# Altium PCB imx477.PcbDoc
Units mm, origin at the board's own origin, x right, y up, seen from the top; angles counter-clockwise.
Board outline 27 x 27 mm, 4 copper layers (Top Layer, Layer 1, Layer 2, Bottom Layer), stack 0.746 mm thick; 65 components, 34 nets, 347 pads, 310 vias.
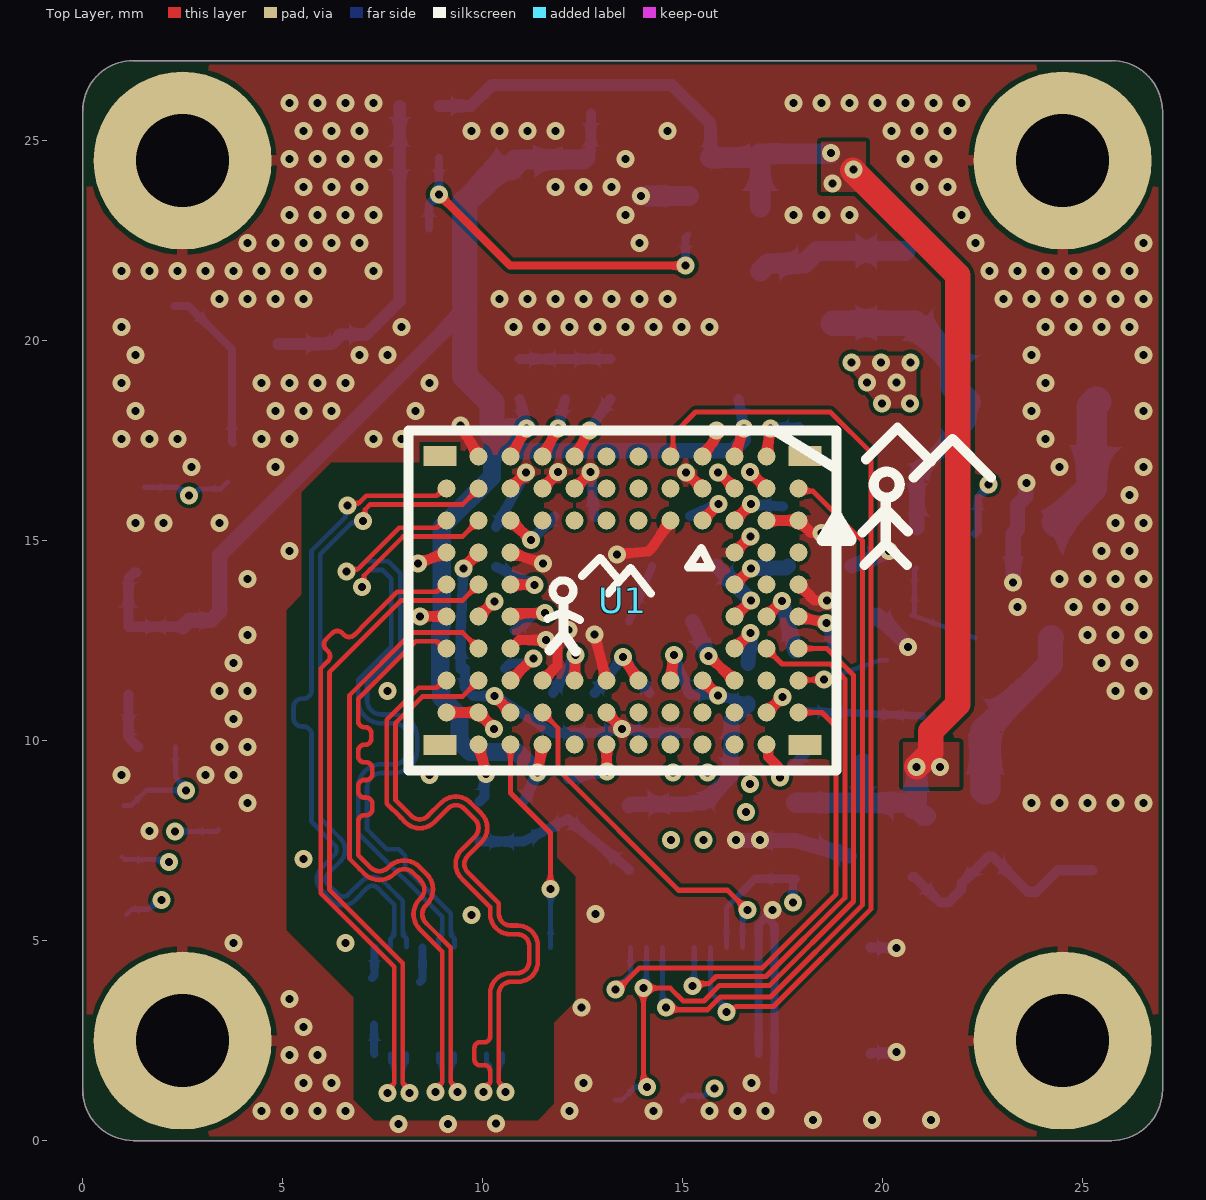
[diagram p0: Top Layer view]
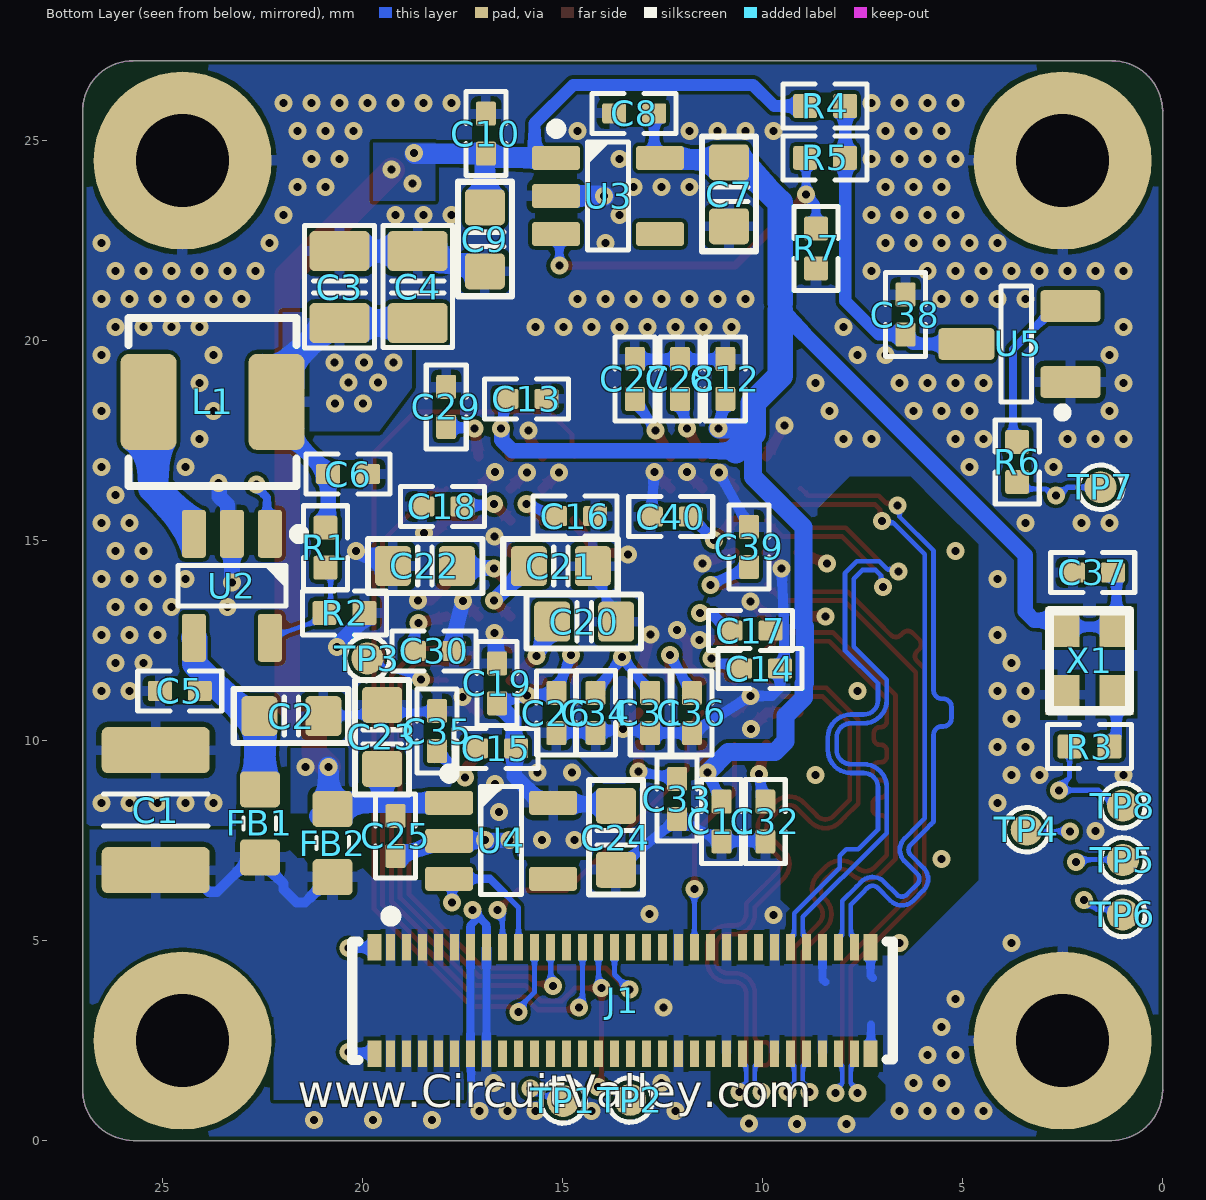
[diagram p1: Bottom Layer view, seen from below]
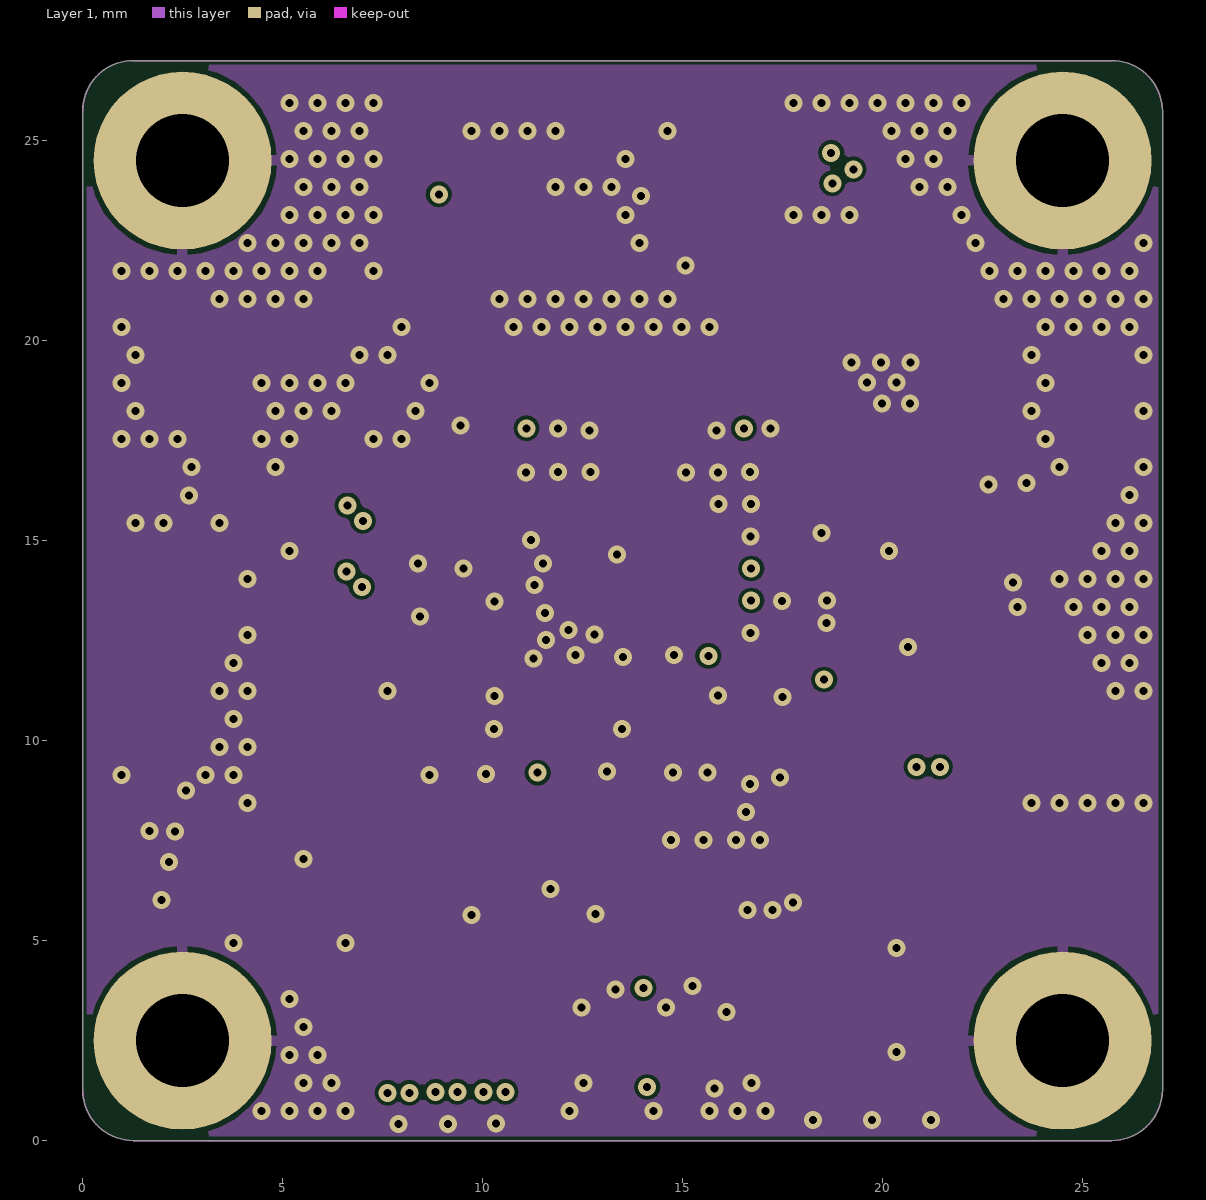
[diagram p2: Layer 1]
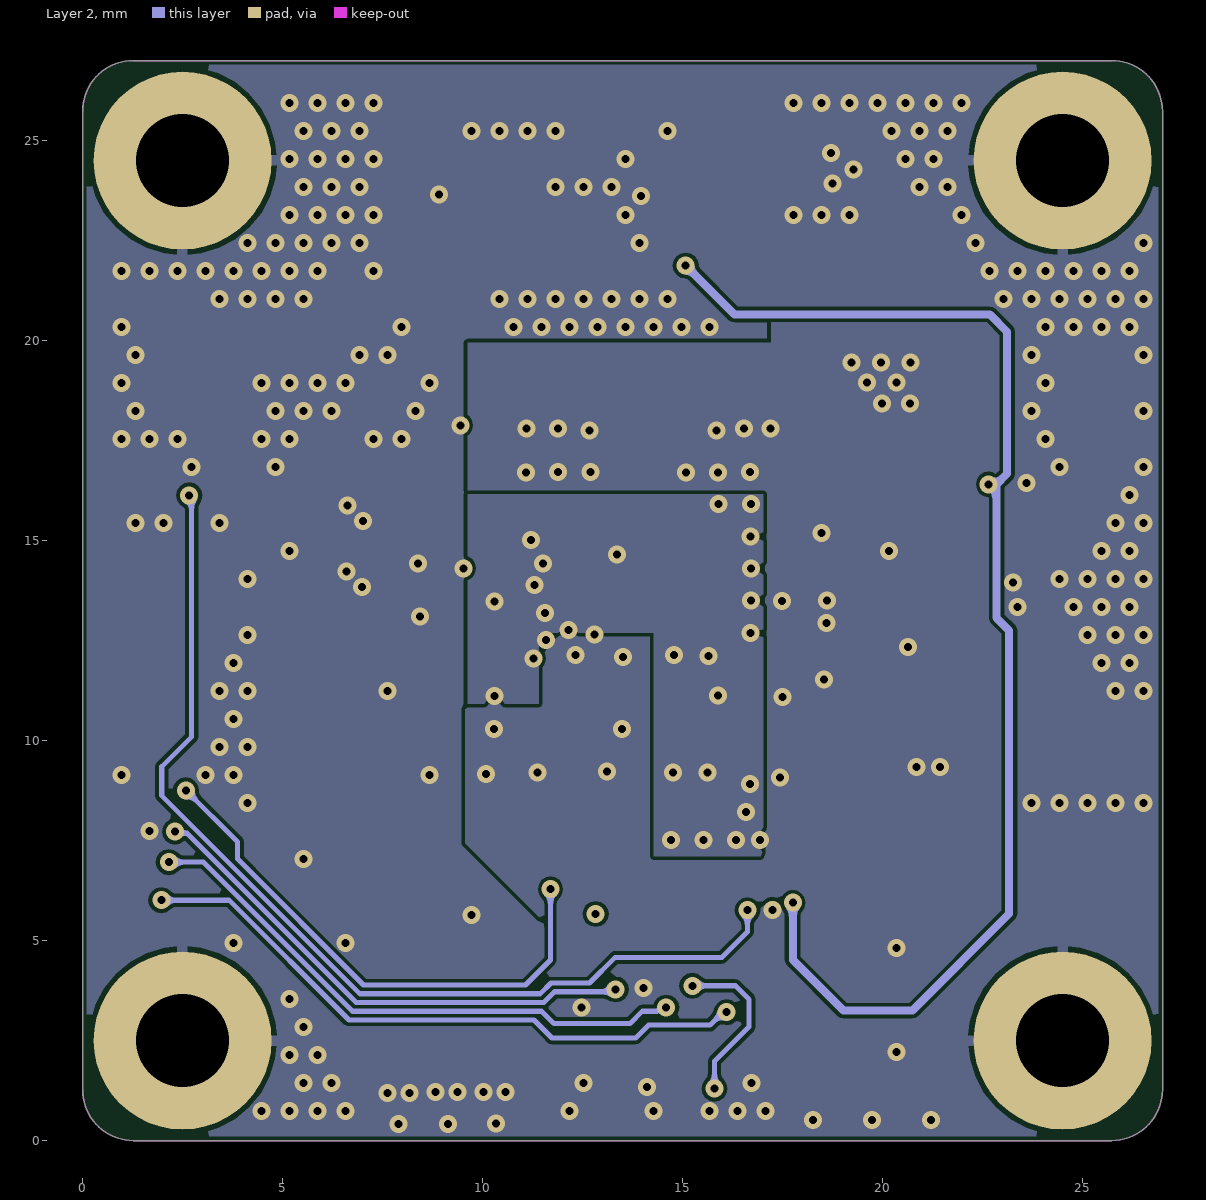
[diagram p3: Layer 2]
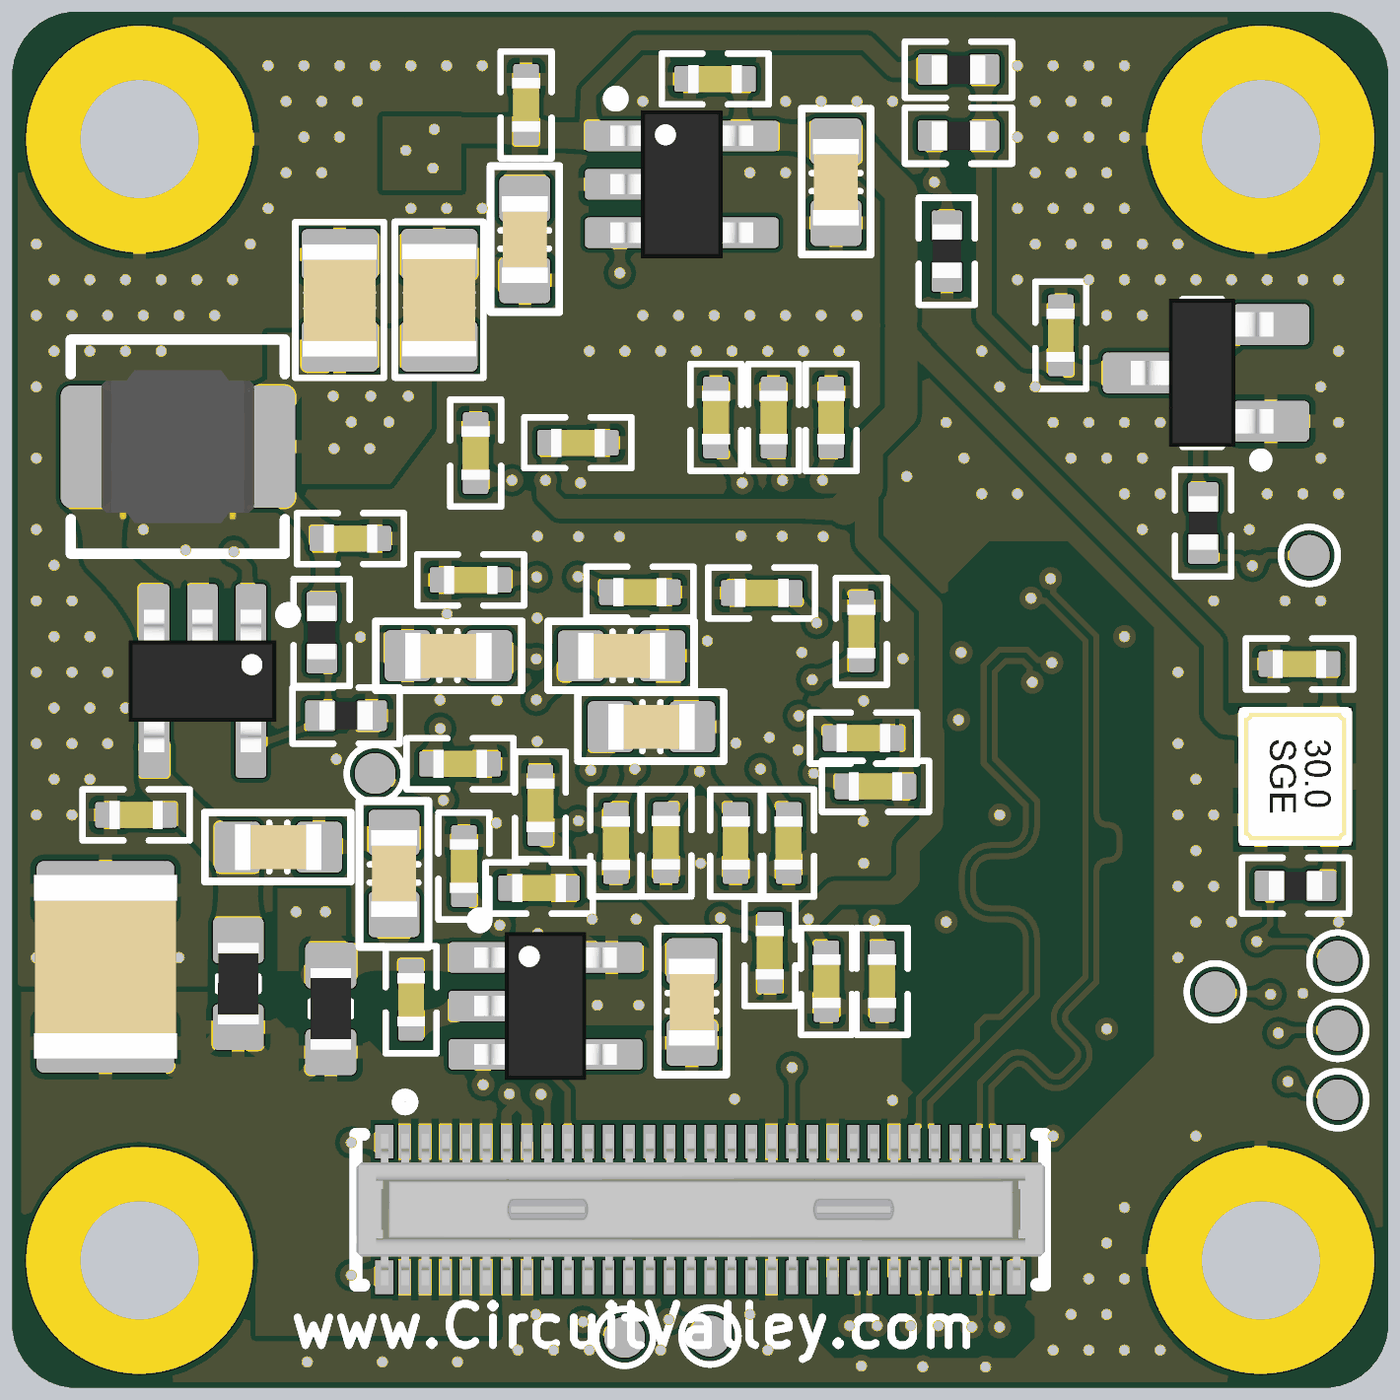
[diagram p4: 3D render of the assembled board from below, using the file's embedded part models]

## Layer stack, top to bottom
Top Solder: solder mask 0.01, Solder Resist, Dk 3.5
Top Layer: signal copper 0.036
Dielectric 2: prepreg 0.071, PP-006, Dk 4.1
Layer 1: signal copper 0.035
Dielectric 4: prepreg 0.071, PP-006, Dk 4.1
Dielectric 1: dielectric 0.32, FR-4, Dk 4.8
Dielectric 5: prepreg 0.071, PP-006, Dk 4.1
Layer 2: signal copper 0.035
Dielectric 3: prepreg 0.071, PP-006, Dk 4.1
Bottom Layer: signal copper 0.036
Bottom Solder: solder mask 0.01, Solder Resist, Dk 3.5

## Board outline
0,1.27 0,25.73 cw(c1.27,25.73) 1.27,27 25.73,27 cw(c25.73,25.73) 27,25.73 27,1.27 cw(c25.73,1.27) 25.73,0 1.27,0 cw(c1.27,1.27)

## Design rules (kind name [scope] priority, off if disabled: settings)
Clearance Clearance_GNDT [OnLayer('GND_T')] p1: gap=0.127 ignorepadtopadclearanceinfootprint=FALSE
Clearance Clearance_INT [OnLayer('Signal_INT')] p2: gap=0.127 ignorepadtopadclearanceinfootprint=FALSE
Clearance [All] p3: gap=0.092 ignorepadtopadclearanceinfootprint=FALSE
Clearance Clearance_PWR [OnLayer('PWR')] p4: gap=0.127 ignorepadtopadclearanceinfootprint=FALSE
Clearance Clearance_GNDB [OnLayer('GND_B')] p5: gap=0.127 ignorepadtopadclearanceinfootprint=FALSE
ComponentClearance [All] p1: gap=0.254 collisioncheckmode=3 verticalgap=0 showdistances=FALSE
DiffPairsRouting [All] p1: maxlimit=0.102 minlimit=0.102 mostfreqgap=0.102 toplayer_minwidth=0.117 toplayer_maxwidth=0.254 toplayer_prefwidth=0.117 midlayer1_minwidth=0.117 midlayer1_maxwidth=0.254 midlayer1_prefwidth=0.117 midlayer4_minwidth=0.117 midlayer4_maxwidth=0.254 midlayer4_prefwidth=0.117 bottomlayer_minwidth=0.117 bottomlayer_maxwidth=0.254 bottomlayer_prefwidth=0.117 maxuncoupledlength=12.7
HoleSize [All] p1: absolutevalues=TRUE maxlimit=5 minlimit=0.025 maxpercent=80.000 minpercent=20.000
MatchedLengths Matched_MIPI_GRP [InNetClass('MIPI')] p1: tolerance=0.127 checknetsindiffpair=FALSE checkdiffpairvsdiffpair=TRUE checkxsignals=TRUE checkothers=TRUE
MatchedLengths Matched_MIPI [InNetClass('MIPI')] p2: tolerance=0.127 checknetsindiffpair=TRUE checkdiffpairvsdiffpair=FALSE checkxsignals=FALSE checkothers=FALSE
MatchedLengths Matched_GPIF_GRP [InNetClass('GPIF')] p3: tolerance=1.27 checknetsindiffpair=FALSE checkdiffpairvsdiffpair=TRUE checkxsignals=TRUE checkothers=TRUE
MatchedLengths Matched_USB3FX_GRP [InNetClass('USB3FX')] p4: tolerance=0.127 checknetsindiffpair=FALSE checkdiffpairvsdiffpair=TRUE checkxsignals=TRUE checkothers=TRUE
MatchedLengths Match_USB3FX [InNetClass('USB3FX')] p5: tolerance=0.102 checknetsindiffpair=TRUE checkdiffpairvsdiffpair=FALSE checkxsignals=FALSE checkothers=FALSE
MatchedLengths Matched_USB3_GRP [InNetClass('USB3')] p6: tolerance=0.254 checknetsindiffpair=FALSE checkdiffpairvsdiffpair=TRUE checkxsignals=TRUE checkothers=TRUE
MatchedLengths Matched_USB2 [InNetClass('USB2')] p7: tolerance=1.016 checknetsindiffpair=TRUE checkdiffpairvsdiffpair=FALSE checkxsignals=FALSE checkothers=FALSE
MatchedLengths Matched_USB3 [InNetClass('USB3')] p8: tolerance=0.102 checknetsindiffpair=TRUE checkdiffpairvsdiffpair=FALSE checkxsignals=FALSE checkothers=FALSE
MinimumSolderMaskSliver [All] p1: minsoldermaskwidth=0.001
PlaneClearance [All] p1: clearance=0.152
PlaneConnect PlaneConnect_1 [All] p1: pad.planeconnectstyle=Relief pad.reliefexpansion=0.508 pad.reliefentries=4 pad.reliefconductorwidth=0.254 pad.reliefairgap=0.127 via.planeconnectstyle=Direct via.reliefexpansion=0.508 via.reliefentries=4 via.reliefconductorwidth=0.254 via.reliefairgap=0.254
PolygonConnect [All] p1: thpad.connectstyle=Relief thpad.reliefconductorwidth=0.254 thpad.reliefentries=4 thpad.polygonreliefangle="90 Angle" thpad.airgapwidth=0.127 smdpad.connectstyle=Relief smdpad.reliefconductorwidth=0.254 smdpad.reliefentries=4 smdpad.polygonreliefangle="90 Angle" smdpad.airgapwidth=0.127 via.connectstyle=Direct via.reliefconductorwidth=0.254 via.reliefentries=4 via.polygonreliefangle="90 Angle" via.airgapwidth=0.254
RoutingVias [All] p1: holewidth=0.2 width=0.45 viastyle="Through Hole" minholewidth=0.2 minwidth=0.45 maxholewidth=6.3 maxwidth=7
SilkToSilkClearance [All] p1: silktosilkclearance=0
SilkToSolderMaskClearance [IsPad] p1: minsilkscreentomaskgap=0 clearancetoexposedcopper=TRUE
SolderMaskExpansion [All] p1: expansion=0.025 istentingtop=FALSE
Width [All] p1: maxlimit=1.27 minlimit=0.09 preferedwidth=0.127 midlayer1_minwidth=0.127 midlayer4_minwidth=0.127 minimp=50.000000 maximp=50.000000 favimp=50.000000
22 further rules are at their usual default settings.

## Classes and differential pairs
net class MIPI: CAM_CLK_N CAM_CLK_P CAM_D1_N CAM_D1_P CAM_D2_N CAM_D2_P CAM_D3_N CAM_D3_P CAM_D4_N CAM_D4_P
differential pair CAM_D4: +CAM_D4_P -CAM_D4_N
differential pair CAM_D3: +CAM_D3_P -CAM_D3_N
differential pair CAM_D2: +CAM_D2_P -CAM_D2_N
differential pair CAM_D1: +CAM_D1_P -CAM_D1_N
differential pair CAM_CLK: +CAM_CLK_P -CAM_CLK_N

## Components (designator, comment, footprint, x,y, rotation, side; value= is the part's Value field where it differs from the comment)
C1 "10µ" CAPC3225N 25.17,8.259 r90 bottom
C2 "approved sub OK" CAPC1608N 21.779,10.609 r180 bottom value=10u
C3 "10uF" CAPC2012N 20.574,21.336 r90 bottom
C4 "10uF" CAPC2012N 18.621,21.34 r90 bottom
C5 "100n" CAPC1005N 24.568,11.24 r180 bottom
C6 "100n" CAPC1005N 20.363,16.662 r0 bottom
C7 "approved sub OK" CAPC1608N 10.836,23.655 r270 bottom value=10u
C8 "100n" CAPC1005N 13.208,25.679 r180 bottom
C9 "approved sub OK" CAPC1608N 16.942,22.53 r270 bottom value=10u
C10 "100n" CAPC1005N 16.916,25.171 r270 bottom
C11 "100n" CAPC1005N 11.024,7.976 r90 bottom
C12 "100n" CAPC1005N 10.932,19.039 r270 bottom
C13 "100n" CAPC1005N 15.9,18.542 r0 bottom
C14 "100n" CAPC1005N 10.062,11.8 r0 bottom
C15 "100n" CAPC1005N 16.662,9.804 r180 bottom
C16 "100n" CAPC1005N 14.683,15.61 r0 bottom
C17 "100n" CAPC1005N 10.297,12.748 r0 bottom
C18 "100n" CAPC1005N 18.004,15.851 r180 bottom
C19 "100n" CAPC1005N 16.637,11.43 r270 bottom
C20 "approved sub OK" CAPC1608N 14.457,12.971 r180 bottom value=1u
C21 "approved sub OK" CAPC1608N 15.042,14.36 r180 bottom value=2u2
C22 "approved sub OK" CAPC1608N 18.442,14.365 r0 bottom value=2u2
C23 "approved sub OK" CAPC1608N 19.509,10.092 r90 bottom value=10u
C24 "approved sub OK" CAPC1608N 13.665,7.569 r270 bottom value=10u
C25 "100n" CAPC1005N 19.173,7.613 r90 bottom
C26 "100n" CAPC1005N 15.154,10.688 r90 bottom
C27 "100n" CAPC1005N 13.192,19.039 r270 bottom
C28 "100n" CAPC1005N 12.062,19.039 r270 bottom
C29 "100n" CAPC1005N 17.907,18.339 r270 bottom
C30 "100n" CAPC1005N 18.212,12.243 r0 bottom
C31 "100n" CAPC1005N 12.807,10.688 r90 bottom
C32 "100n" CAPC1005N 9.931,7.976 r90 bottom
C33 "100n" CAPC1005N 12.133,8.54 r90 bottom
C34 "100n" CAPC1005N 14.173,10.693 r90 bottom
C35 "100n" CAPC1005N 18.136,10.236 r270 bottom
C36 "100n" CAPC1005N 11.766,10.688 r90 bottom
C37 "100n" CAPC1005N 1.743,14.201 r180 bottom
C38 "100n" CAPC1005N 6.426,20.65 r270 bottom
C39 "100n" CAPC1005N 10.338,14.842 r270 bottom
C40 "100n" CAPC1005N 12.294,15.596 r180 bottom
FB1 "Ferrite" INDC1608N 22.565,7.928 r90 bottom
FB2 "Ferrite" INDC1608N 20.749,7.437 r90 bottom
J1 "DF40C-60DP-0.4V(51)" DF40C-60DP-0.4V 13.5,3.5 r180 bottom locked
L1 "2u2" FDSD0420-H-2R2M 23.749,18.466 r180 bottom
R1 "Thick Film" RESC1005N 20.927,14.82 r90 bottom value=30K
R2 "Thick Film" RESC1005N 20.449,13.188 r0 bottom value=27K
R3 "Thick Film" RESC1005N 1.822,9.85 r0 bottom value=0R
R4 "Thick Film" RESC1005N 8.433,25.863 r0 bottom value="2.2K NC"
R5 "Thick Film" RESC1005N 8.433,24.567 r180 bottom value=22R
R6 "Thick Film" RESC1005N 3.632,16.967 r270 bottom value=0R
R7 "Thick Film" RESC1005N 8.661,22.301 r90 bottom value=10K
TP1 "TestPoint" SMD_test_point 14.986,0.991 r0 bottom
TP2 "TestPoint" SMD_test_point 13.31,1.016 r0 bottom
TP3 "TestPoint" SMD_test_point 19.877,12.053 r0 bottom
TP4 "TestPoint" SMD_test_point 3.396,7.77 r0 bottom
TP5 "TestPoint" SMD_test_point 0.991,7.013 r0 bottom
TP6 "TestPoint" SMD_test_point 0.991,5.652 r180 bottom
TP7 "TestPoint" SMD_test_point 1.549,16.332 r180 bottom
TP8 "TestPoint" SMD_test_point 0.991,8.373 r0 bottom
U1 "IMX477AACK-C" IMX477 13.5,13.5 r180 top locked
U2 "AP3417C" SOT23-5 23.266,13.868 r270 bottom
U3 "MIC550x" SOT23-5 13.863,23.614 r180 bottom
U4 "MIC550x" SOT23-5 16.535,7.493 r180 bottom
U5 "APX803" SOT23-3 3.652,19.914 r0 bottom
X1 "DSO221SR" "Active Oscillator 2520" 1.825,11.993 r270 bottom

## Footprints (in the part's own frame and the unit in brackets; to place one, negate y for a bottom-side part, rotate by r counter-clockwise, add the part's x,y. Pads: shape width x height; smd on the part's side, far side on the other; paste and mask are expansions set on the pad)
"Active Oscillator 2520" [mm]
  rect 1x0.85 smd: 1(-0.85,-0.675) 2(0.85,-0.675) 3(0.85,0.675) 4(-0.85,0.675)
  silkscreen extent -1.25,-1 1.25,1, body extent -1.25,-1 1.25,1, height 0.56
CAPC1005N [mm] "Chip Capacitor, Body 1.0x0.5mm, 0402, IPC Medium Density"
  round 0.2 on Mech14: 0(0,0)
  rrect20% 0.6x0.5 smd: 1(-0.5,0) 2(0.5,0)
  Top Layer pour cut-out: -0.2,0.35 0.2,0.35 0.2,-0.35 -0.2,-0.35
  silkscreen extent -1.05,-0.5 1.05,0.5, body extent -0.52,-0.27 0.53,0.28, height 0.55
CAPC1608N [mm] "Chip Capacitor, Body 1.6x0.8mm, 0603, IPC Medium Density"
  round 0.254 on Mech14: 0(0,0)
  rrect25% 0.9x1 smd: 1(-0.8,0) 2(0.8,0)
  silkscreen extent -1.44,-0.67 1.42,0.68, body extent -0.85,-0.45 0.85,0.45, height 0.89
CAPC2012N [mm] "Chip Capacitor, Body 2.0x1.2mm, 0805, IPC Medium Density"
  round 0.254 on Mech14: 0(0,0)
  rrect25% 1x1.5 smd: 1(-0.9,0) 2(0.9,0)
  silkscreen extent -1.52,-0.87 1.54,0.87, body extent -1.1,-0.72 1.1,0.73, height 1.34
CAPC3225N [mm] "Chip Capacitor, Body 3.2x2.5mm, 1210, IPC Medium Density"
  round 0.508 on Mech14: 0(0,0)
  rrect25% 1.15x2.7 smd: 1(-1.5,0) 2(1.5,0)
  silkscreen extent -0.4,-1.3 0.4,1.3, body extent -1.8,-1.4 1.8,1.4, height 2.19
DF40C-60DP-0.4V [mm] "Hiros 60Pin 0.4mm Connector Used with Camera Sensors"
  rect 0.23x0.66 smd: 1(-5.8,1.33) 2(-5.8,-1.33) 3(-5.4,1.33) 4(-5.4,-1.33) 5(-5,1.33) 6(-5,-1.33) 7(-4.6,1.33) 8(-4.6,-1.33) 9(-4.2,1.33) 10(-4.2,-1.33) 11(-3.8,1.33) 12(-3.8,-1.33) 13(-3.4,1.33) 14(-3.4,-1.33) 15(-3,1.33) 16(-3,-1.33) 17(-2.6,1.33) 18(-2.6,-1.33) 19(-2.2,1.33) 20(-2.2,-1.33) 21(-1.8,1.33) 22(-1.8,-1.33) 23(-1.4,1.33) 24(-1.4,-1.33) 25(-1,1.33) 26(-1,-1.33) 27(-0.6,1.33) 28(-0.6,-1.33) 29(-0.2,1.33) 30(-0.2,-1.33) 31(0.2,1.33) 32(0.2,-1.33) 33(0.6,1.33) 34(0.6,-1.33) 35(1,1.33) 36(1,-1.33) 37(1.4,1.33) 38(1.4,-1.33) 39(1.8,1.33) 40(1.8,-1.33) 41(2.2,1.33) 42(2.2,-1.33) 43(2.6,1.33) 44(2.6,-1.33) 45(3,1.33) 46(3,-1.33) 47(3.4,1.33) 48(3.4,-1.33) 49(3.8,1.33) 50(3.8,-1.33) 51(4.2,1.33) 52(4.2,-1.33) 53(4.6,1.33) 54(4.6,-1.33) 55(5,1.33) 56(5,-1.33) 57(5.4,1.33) 58(5.4,-1.33) 59(5.8,1.33) 60(5.8,-1.33)
  rect 0.35x0.66 smd: S1(-6.2,-1.33) S1(-6.2,1.33) S1(6.2,-1.33) S1(6.2,1.33)
  silkscreen extent -6.76,-1.48 6.76,2.24, body extent -6.75,-1.49 6.77,1.48, height 1.1
FDSD0420-H-2R2M [mm] "Murata"
  rrect30% 1.4x2.4 smd: 1(-1.6,0) 2(1.6,0)
  silkscreen extent -2.1,-2.1 2.1,2.1, body extent -1.5,-1.5 1.5,1.5, height 1.35
IMX477 [mm]
  round 0.45 smd: A2(-4.4,-2.8) A3(-4.4,-2) A4(-4.4,-1.2) A5(-4.4,-0.4) A6(-4.4,0.4) A7(-4.4,1.2) A8(-4.4,2) A9(-4.4,2.8) B1(-3.6,-3.6) B2(-3.6,-2.8) B3(-3.6,-2) B4(-3.6,-1.2) B5(-3.6,-0.4) B6(-3.6,0.4) B7(-3.6,1.2) B8(-3.6,2) B9(-3.6,2.8) B10(-3.6,3.6) C1(-2.8,-3.6) C2(-2.8,-2.8) C3(-2.8,-2) C4(-2.8,-1.2) C5(-2.8,-0.4) C6(-2.8,0.4) C7(-2.8,1.2) C8(-2.8,2) C9(-2.8,2.8) C10(-2.8,3.6) D1(-2,-3.6) D2(-2,-2.8) D3(-2,-2) D8(-2,2) D9(-2,2.8) D10(-2,3.6) E1(-1.2,-3.6) E2(-1.2,-2.8) E3(-1.2,-2) E8(-1.2,2) E9(-1.2,2.8) E10(-1.2,3.6) F1(-0.4,-3.6) F2(-0.4,-2.8) F3(-0.4,-2) F8(-0.4,2) F9(-0.4,2.8) F10(-0.4,3.6) G1(0.4,-3.6) G2(0.4,-2.8) G3(0.4,-2) G8(0.4,2) G9(0.4,2.8) G10(0.4,3.6) H1(1.2,-3.6) H2(1.2,-2.8) H3(1.2,-2) H8(1.2,2) H9(1.2,2.8) H10(1.2,3.6) J1(2,-3.6) J2(2,-2.8) J3(2,-2) J8(2,2) J9(2,2.8) J10(2,3.6) K1(2.8,-3.6) K2(2.8,-2.8) K3(2.8,-2) K4(2.8,-1.2) K5(2.8,-0.4) K6(2.8,0.4) K7(2.8,1.2) K8(2.8,2) K9(2.8,2.8) K10(2.8,3.6) L1(3.6,-3.6) L2(3.6,-2.8) L3(3.6,-2) L4(3.6,-1.2) L5(3.6,-0.4) L6(3.6,0.4) L7(3.6,1.2) L8(3.6,2) L9(3.6,2.8) L10(3.6,3.6) M2(4.4,-2.8) M3(4.4,-2) M4(4.4,-1.2) M5(4.4,-0.4) M6(4.4,0.4) M7(4.4,1.2) M8(4.4,2) M9(4.4,2.8)
  rect 0.83x0.5 smd: Q1(-4.565,-3.615) Q2(4.565,-3.615) Q3(4.565,3.615) Q4(-4.565,3.615)
  silkscreen extent -9.21,-4.32 5.35,4.25, body extent -5.36,-4.24 5.34,4.24, height 1.62
INDC1608N [mm] "Chip bead, Body 1.6x0.8mm, 0603, IPC Medium Density"
  round 0.254 on Mech14: 0(0,0)
  rrect25% 0.9x1 smd: 1(-0.85,0) 2(0.85,0)
  Top Layer pour cut-out: -0.4,0.6 0.4,0.6 0.4,-0.6 -0.4,-0.6
  silkscreen extent -0.15,-0.41 0.15,0.41, body extent -0.8,-0.4 0.8,0.4, height 0.79
RESC1005N [mm] "Chip Resistor, Body 1.0x0.5mm, EIA 0402, IPC Medium Density"
  round 0.2 on Mech14: 0(0,0)
  rrect20% 0.6x0.6 smd: 1(-0.5,0) 2(0.5,0)
  Top Layer pour cut-out: -0.2,0.35 0.2,0.35 0.2,-0.35 -0.2,-0.35
  silkscreen extent -1.05,-0.55 1.05,0.55, body extent -0.52,-0.27 0.53,0.28, height 0.4
SMD_test_point [mm]
  round 0.8 smd: 1(0,0)
  silkscreen extent -0.56,-0.56 0.56,0.56, body extent -0.56,-0.3 0.3,0.3, height 1.52
SOT23-3 [mm]
  round 0.5 on Mech14: 0(0,0)
  rrect25% 1.5x0.8 smd: 1(-1.35,0.95) 2(-1.35,-0.95)
  rrect25% 1.4x0.8 smd: 3(1.25,0)
  silkscreen extent -1.25,-1.45 0.38,1.81, body extent -1.4,-1.45 1.4,1.45, height 1.29
SOT23-5 [mm]
  round 0.5 on Mech14: 0(0,0)
  rrect25% 1.2x0.6 smd: 1(-1.3,0.95) 2(-1.3,0) 3(-1.3,-0.95) 4(1.3,-0.95) 5(1.3,0.95)
  silkscreen extent -1.42,-1.35 0.51,1.81, body extent -1.4,-1.45 1.4,1.45, height 1.44

## Part data
C1: library part CAPC_10u_1210_50V, "Capacitor SMD Cer 10uF 20% 16V X5R 1210", Manufacturer 1="Taiyo Yuden", Manufacturer Part Number 1=UMK325BJ106MM-T, Package / Case="1210 (3225 Metric)", Ratings="50V; X5R", Supplier Part Number 1=587-2225-1-ND, Tolerance=±20%, Material=ceramic, Size / Dimension="0.126\" L x 0.098\" W (3.20mm x 2.50mm)", Supplier 1=Digi-Key
C2 C7 C9 C20 C21 C22 C23 C24: library part CAPC_560p_0603_5%, "Capacitor SMD Cer 560pF 5% 50V NP0 0603", Capacitance=470pF, Manufacturer 1="AVX Corporation", Manufacturer Part Number 1=06035A561JAT2A, Operating Temperature="-55°C ~ 125°C", Package / Case="0603 (1608 metric)", Ratings="50V; NP0", Supplier Part Number 1=478-1184-1-ND, Voltage - Rated=50V, Applications="General Purpose", ComponentLink1Description=http://www.avx.com/docs/Catalogs/ccog.pdf, ComponentLink1URL=http://www.avx.com/docs/Catalogs/ccog.pdf, Height - Seated (Max)=-, Lead Spacing=-, Lead Style=-, Material=ceramic, Mounting Type="Surface Mount, MLCC", Size / Dimension="0.063\" L x 0.032\" W (1.60mm x 0.81mm)", Supplier 1=Digi-Key, Thickness (Max)="0.035\" (0.90mm)"
C3 C4: library part CAPC_4u7_0805, "Capacitor SMD Cer 4.7uF 10% 16V X5R 0805", Manufacturer 1="Taiyo Yuden", Manufacturer Part Number 1=EMK212BJ475KG-T, Operating Temperature="-55°C ~ 85°C", Package / Case="0805 (2012 Metric)", Ratings="16V; X5R", Supplier Part Number 1=587-1294-1-ND, Tolerance=±10%, ComponentLink1Description=http://www.yuden.co.jp/productdata/catalog/en/mlcc01_e.pdf, ComponentLink1URL=http://www.yuden.co.jp/productdata/catalog/en/mlcc01_e.pdf, Material=ceramic, Size / Dimension="0.079\" L x 0.049\" W (2.00mm x 1.25mm)", Supplier 1=Digi-Key, Thickness (Max)="0.053\" (1.35mm)"
C5 C6 C8 C10 C11 C12 C13 C14 C15 C16 C17 C18 C19 C25 C26 C27 C28 C29 C30 C31 C32 C33 C34 C35 C36 C37 C38 C39 C40: library part CAPC_10n_0402_16V_10%, "Capacitor SMD Cer 10nF 10% 16V X7R 0402", Manufacturer 1="AVX Corporation", Manufacturer 2=Yageo, Manufacturer Part Number 1=0402YC103KAT2A, Manufacturer Part Number 2=CC0402KRX7R7BB103, Operating Temperature="-55°C ~ 125°C", Package / Case="0402 (1005 Metric)", Ratings="16V; X7R", Supplier Part Number 1=478-1114-1-ND, Tolerance=±10%, ComponentLink1Description=http://www.avx.com/docs/Catalogs/cx7r.pdf, ComponentLink1URL=http://www.avx.com/docs/Catalogs/cx7r.pdf, ComponentLink2Description=http://www.yageo.com/documents/recent/UPY-GPHC_X7R_6.3V-to-50V_8.pdf, ComponentLink2URL=http://www.yageo.com/documents/recent/UPY-GPHC_X7R_6.3V-to-50V_8.pdf, Size / Dimension="0.039\" L x 0.020\" W (1.00mm x 0.50mm)", Supplier 1=Digi-Key, Supplier 2=Digi-Key, Supplier Part Number 2=311-1042-1-ND
J1: library part LSHM-130-xx, "Samtec 0.5mm 60 pin Connector"
L1: library part inductor_smd
R1 R2 R3 R4 R5 R6 R7: library part RES_3K3_0402_5%, "Resistor SMD chip 3.3k Ohm 0.063W 5% 0402", Manufacturer 1=Yageo, Manufacturer Part Number 1=RC0402JR-073K3L, Package / Case="0402 (1005 metric)", Ratings="1/16 W", Supplier Part Number 1=311-3.3KJRCT-ND, Tolerance=±5%, ComponentLink1Description=http://www.yageo.com/documents/recent/PYu-RC0402_51_RoHS_L_6.pdf, ComponentLink1URL=http://www.yageo.com/documents/recent/PYu-RC0402_51_RoHS_L_6.pdf, Material="Thick Film", Supplier 1=Digi-Key
TP1 TP2 TP3 TP4 TP5 TP6 TP7 TP8: library part SMD_Test_Point, "SMD Test Point"
U1: "Sony Color Image Sensor"
X1: library part Oscillator_2520, "Active Oscillator_2520"

## Free pads (board coordinates)
  round 4.45 hole 2.32: Q5(2.5,24.5) Q6(24.5,24.5) Q7(24.5,2.5) Q8(2.5,2.5)

## Via types
v1: diameter 0.45, hole 0.2, Top Layer to Bottom Layer, tented both sides, 310 vias

## Nets (pads, with @x,y where several pads share a name; then routed paths per layer and width w, separated by ;. In a path a pad name is that pad's centre, name@x,y a point inside that pad or via, vN(x,y) a via of type N, cw(c..) or ccw(c..) an arc to the next point about the centre after c; other vN are vias at no path point)
1V05: C3.1 C4.1 C6.2 C27.2 C28.2 C29.2 C30.2 C31.2 C32.2 C33.2 C34.2 C35.2 C36.2 L1.2 R1.2 U1.A6 U1.B1 U1.B10 U1.F8 U1.G10 U1.H1 U1.H8 U1.J1 U1.L10 | length 24.2
  Top Layer w0.254: U1.L10 10.084,9.22 v1(10.084,9.169) ; U1.J1 v1(11.887,17.805) ; U1.H8 v1(12.319,12.141) ; U1.H1 v1(12.675,17.755) ; U1.G10 v1(13.106,9.22) ; v1(13.513,12.09) U1.F8 ; U1.B10 17.142,9.858 17.142,9.596 17.397,9.341 17.397,9.115 v1(17.435,9.078) ; U1.B1 v1(17.196,17.805) ; U1.A6 v1(18.602,12.935)
  Bottom Layer w0.254: C32.2 10.046,8.59 10.046,9.131 v1(10.084,9.169) ; C36.2 v1(12.319,12.141) ; v1(11.887,17.805) C28.2 ; C33.2 v1(13.106,9.22) ; v1(12.675,17.755) C27.2 ; C31.2 v1(13.513,12.09) C34.2 ; v1(17.196,17.805) C29.2 ; v1(17.435,9.078) 17.477,9.078 C35.2 ; v1(18.602,12.935) C30.2@18.813,12.243
  Bottom Layer w0.381: R1.2@20.853,15.316 20.858,15.321 20.858,16.658 C6.2 20.913,16.662 20.972,16.722 20.972,16.789 22.149,17.966 L1.2
  Bottom Layer w0.635: C4.1@18.77,20.436 C3.1 20.824,20.436 21.766,19.493 21.766,18.848 L1.2
  other v1: 19.984,18.428 20.684,18.428 19.609,18.948 20.345,18.948 19.228,19.456 19.964,19.456 20.701,19.456
1V8: C7.1 C8.2 C11.2 C12.2 C13.2 C37.2 U1.C1 U1.J10 U1.K1 U3.5 X1.1 X1.4 | length 47.3
  Top Layer w0.254: U1.K1 v1(11.1,17.805) ; v1(11.379,9.195) U1.J10 ; U1.C1 v1(16.535,17.805)
  Bottom Layer w0.254: C37.2@1.342,14.203 1.292,14.203 1.15,14.06 X1.4 X1.1 ; C12.2 v1(11.1,17.805) ; C11.2 v1(11.379,9.195) ; U3.5@12.568,24.572 12.708,24.712 C8.2 ; C13.2 v1(16.535,17.805)
  Bottom Layer w0.381: X1.1 2.662,13.005 3.206,13.005 3.429,13.228 3.429,14.63 9.56,20.762 9.56,20.93 ; 10.668,17.247 16.259,17.247 16.522,17.51 16.522,17.792 v1(16.535,17.805)
  Bottom Layer w0.457: 10.236,17.678 10.236,16.593 8.977,15.334 8.977,12.88 8.941,12.844 8.941,11.447 8.968,11.42 8.968,11.073 9.423,10.617 9.423,9.982 9.691,9.714 10.86,9.714 v1(11.379,9.195)
  Bottom Layer w0.508: 10.668,17.805 v1(11.1,17.805) ; C7.1 10.907,24.526 12.522,24.526 U3.5@12.568,24.572
  Bottom Layer w0.635: 9.56,20.762 9.56,19.116 10.236,18.44 10.236,17.678 10.668,17.247 ; 9.56,20.93 9.56,23.455 10.429,24.323 10.704,24.323 C7.1
2V8: C14.2 C15.2 C16.2 C17.2 C18.2 C19.2 C24.1 C26.2 C39.2 C40.2 U1.C3 U1.D3 U1.D8 U1.E8 U1.K3 U1.K5 U1.K6 U1.K8 U4.5 | length 18
  Top Layer w0.254: U1.K8 11.255,12.055 v1(11.272,12.055) ; U1.K6 10.785,13.185 v1(11.566,13.185) ; U1.K5 v1(11.303,13.894) ; U1.K3 v1(11.214,15.009) ; U1.E8 v1(14.783,12.141) ; U1.D8 v1(15.892,11.125) ; U1.D3 v1(15.9,15.916) ; U1.C3 v1(16.708,15.908)
  Bottom Layer w0.254: C39.2 v1(11.303,13.894) ; C14.2 10.685,11.923 11.088,11.923 11.219,12.055 v1(11.272,12.055) ; C17.2 10.847,12.748 11.247,13.148 11.529,13.148 v1(11.566,13.185) ; v1(11.214,15.009) C40.2 ; v1(14.783,12.141) C26.2 15.186,11.156 15.86,11.156 v1(15.892,11.125) C19.2 ; C16.2 v1(15.9,15.916) ; v1(16.708,15.908) C18.2
  Bottom Layer w0.381: C24.1 13.702,8.406 15.199,8.406 U4.5 15.535,8.443 16.205,9.113 16.205,9.865 16.221,9.881 16.221,10.514 16.528,10.821 16.578,10.821 16.637,10.88 C19.2
  other v1: 14.707,7.508 15.519,7.508 16.586,8.212 16.688,8.915 14.757,9.195 15.621,9.195
+5V: C9.1 C10.2 C23.1 C25.2 FB2.2 R4.2 U3.1 U4.1 | length 34.5
  Top Layer w0.635: v1@19.253,24.257 21.883,21.627 21.883,10.91 21.209,10.236 21.209,9.696 v1(20.854,9.341)
  Bottom Layer w0.305: R4.2 9.708,25.863 10.236,26.391 14.732,26.391 15.697,25.425 U3.1@15.697,24.572
  Bottom Layer w0.508: U3.1@15.697,24.572 C10.2@16.942,24.572 ; C10.2 C10.2@16.942,24.671 ; C9.1 C10.2@16.942,24.572 ; U4.1 19.482,8.443 ; v1@18.694,24.671 C10.2@16.942,24.671 ; C23.1@19.509,9.419 19.509,8.47 19.482,8.443 ; FB2.2 FB2.2@20.749,8.398 ; v1(20.854,9.341) 20.854,8.502 FB2.2@20.749,8.398 ; FB2.2@21.082,8.114 21.032,8.114 FB2.2@20.749,8.398 ; C10.2@16.942,24.572 C10.2@16.942,24.671 ; 19.482,8.443 20.703,8.443 FB2.2@20.749,8.398
  other v1: 21.432,9.34 18.745,23.931 19.276,24.279 18.717,24.691
CAM_CLK: J1.39 R3.2 TP8.1 U1.K10 | length 21.8
  Top Layer w0.127: U1.K10 10.7,8.688 11.699,7.689 v1(11.699,6.286)
  Layer 2 w0.127: v1(2.583,8.757) 3.872,7.468 3.872,7.041 7.025,3.888 11.075,3.888 11.699,4.513 v1(11.699,6.286)
  Bottom Layer w0.127: TP8.1@1.037,8.373 1.219,8.373 1.603,8.757 v1(2.583,8.757) 2.583,8.823 2.322,9.084 R3.2 ; v1(11.699,6.286) 11.705,6.28 11.705,4.835 J1.39
CAM_CLK_N: J1.60 U1.M5 | length 17
  Top Layer w0.117: v1(7.629,1.194) 7.629,1.267 7.791,1.429 7.791,4.346 5.953,6.183 5.953,11.801 6.097,11.944 6.138,11.986 ccw(c6.016,12.107) 6.138,12.229 6.085,12.282 cw(c6.207,12.404) 6.085,12.526 6.248,12.688 cw(c6.37,12.566) 6.492,12.688 6.544,12.636 ccw(c6.666,12.758) 6.788,12.636 7.109,12.957 7.87,13.717 8.852,13.717 9.035,13.9 U1.M5@9.066,13.9
  Bottom Layer w0.117: v1(7.629,1.194) 7.629,1.267 7.791,1.429 7.791,1.864 7.7,1.955 J1.60
CAM_CLK_P: J1.58 U1.L5 | length 17.1
  Top Layer w0.117: v1(8.171,1.194) 8.171,1.267 8.009,1.429 8.009,4.437 6.172,6.274 6.172,11.71 7.96,13.498 9.498,13.498 U1.L5
  Bottom Layer w0.117: J1.58 8.1,1.955 8.009,1.864 8.009,1.429 8.171,1.267 v1(8.171,1.194)
CAM_D1_N: J1.51 U1.M3 | length 17
  Top Layer w0.117: v1(6.602,14.226) 6.654,14.278 6.882,14.278 6.97,14.367 7.921,15.317 8.852,15.317 9.035,15.5 U1.M3@9.066,15.5
  Bottom Layer w0.117: v1(6.602,14.226) 6.654,14.278 6.882,14.278 7.083,14.48 7.64,14.48 7.939,14.18 7.939,12.253 7.112,11.425 7.112,11.176 7.112,11.008 ccw(c7.47,11.008) 7.47,10.649 7.789,10.649 cw(c7.789,10.072) 8.366,10.072 8.366,9.765 cw(c7.789,9.765) 7.789,9.187 7.47,9.187 ccw(c7.47,8.829) 7.112,8.829 7.112,7.777 7.345,7.544 7.61,7.28 7.904,7.28 8.068,7.115 8.068,6.821 9.209,5.68 9.209,5.136 9.3,5.045 J1.51
CAM_D1_P: J1.53 U1.L3 | length 17
  Top Layer w0.117: v1(6.985,13.843) 7.037,13.895 7.037,14.123 7.189,14.276 8.012,15.098 9.498,15.098 U1.L3
  Bottom Layer w0.117: v1(6.985,13.843) 7.037,13.895 7.037,14.123 7.174,14.261 7.508,14.261 7.72,14.048 7.72,12.343 6.893,11.516 6.893,11.176 6.893,11.008 ccw(c7.47,11.008) 7.47,10.43 7.789,10.43 cw(c7.789,10.072) 8.147,10.072 8.147,9.765 cw(c7.789,9.765) 7.789,9.406 7.47,9.406 ccw(c7.47,8.829) 6.893,8.829 6.893,7.687 7.036,7.544 8.991,5.589 8.991,5.136 8.9,5.045 J1.53
CAM_D2_N: J1.52 U1.M7 | length 17
  Top Layer w0.117: U1.M7@9.066,12.3 9.035,12.3 8.852,12.483 8.336,12.483 6.893,11.04 6.893,10.905 6.893,10.487 ccw(c7.047,10.487) 7.047,10.333 7.063,10.333 cw(c7.063,10.179) 7.217,10.179 7.217,10.047 cw(c7.063,10.047) 7.063,9.893 7.047,9.893 ccw(c7.047,9.739) 6.893,9.739 6.893,9.607 ccw(c7.047,9.607) 7.047,9.453 7.092,9.453 cw(c7.092,9.299) 7.246,9.299 7.246,9.167 cw(c7.092,9.167) 7.092,9.013 7.047,9.013 ccw(c7.047,8.859) 6.893,8.859 6.893,8.727 ccw(c7.047,8.727) 7.047,8.573 7.092,8.573 cw(c7.092,8.419) 7.246,8.419 7.246,8.287 cw(c7.092,8.287) 7.092,8.133 7.047,8.133 ccw(c7.047,7.979) 6.893,7.979 6.893,7.481 6.893,7.294 6.893,7.132 7.08,6.945 7.167,6.858 7.198,6.827 ccw(c7.421,7.048) 7.643,6.827 7.662,6.846 cw(c8.04,6.469) 8.417,6.846 8.606,6.657 cw(c8.23,6.279) 8.606,5.902 8.587,5.883 ccw(c8.809,5.66) 8.586,5.438 9.209,4.815 9.209,4.383 9.209,1.454 9.371,1.293 v1(9.371,1.219)
  Bottom Layer w0.117: J1.52 9.3,1.955 9.209,1.864 9.209,1.454 9.371,1.293 v1(9.371,1.219)
CAM_D2_P: J1.54 U1.L7 | length 17.1
  Top Layer w0.117: 7.798,6.672 cw(c7.421,7.048) 7.043,6.672 7.012,6.703 6.925,6.79 6.674,7.041 6.674,11.13 8.246,12.702 9.498,12.702 U1.L7 ; 7.798,6.672 7.817,6.691 cw(c8.04,6.469) 8.262,6.691 8.451,6.502 ; 8.451,6.502 cw(c8.23,6.279) 8.451,6.057 8.432,6.038 ccw(c8.809,5.66) 8.432,5.283 8.991,4.725 8.991,4.165 8.991,1.454 8.829,1.293 v1(8.829,1.219)
  Bottom Layer w0.117: v1(8.829,1.219) 8.829,1.293 8.991,1.454 8.991,1.864 8.9,1.955 J1.54
CAM_D3_N: J1.59 U1.M2 | length 17
  Top Layer w0.117: v1(6.627,15.877) 6.679,15.929 6.908,15.929 7.096,16.117 8.852,16.117 9.035,16.3 U1.M2@9.066,16.3
  Bottom Layer w0.117: 6.295,7.138 5.977,6.82 ccw(c6.26,6.536) 5.977,6.252 6.233,5.997 ccw(c6.517,6.279) 6.801,5.996 7.118,6.314 cw(c7.247,6.186) 7.376,6.315 7.495,6.196 7.791,5.9 7.791,5.136 7.7,5.045 J1.59 ; 6.295,7.396 5.908,7.783 cw(c5.985,7.86) 5.907,7.783 5.789,7.902 5.725,7.966 5.725,8.108 5.725,10.084 5.725,10.142 ccw(c5.516,10.142) 5.516,10.351 5.484,10.351 cw(c5.484,10.559) 5.276,10.559 5.276,10.836 cw(c5.484,10.836) 5.484,11.045 5.516,11.045 ccw(c5.516,11.253) 5.725,11.253 5.725,14.148 5.725,14.746 6.575,15.597 6.575,15.825 v1(6.627,15.877) ; 6.295,7.138 ccw(c6.167,7.267) 6.295,7.396
CAM_D3_P: J1.57 U1.L2 | length 17.1
  Top Layer w0.117: v1(7.01,15.494) 7.062,15.546 7.062,15.774 7.186,15.898 8.943,15.898 9.498,15.898 U1.L2
  Bottom Layer w0.117: 6.646,6.151 cw(c6.517,6.279) 6.388,6.151 6.132,6.407 cw(c6.26,6.536) 6.132,6.665 6.449,6.983 ccw(c6.167,7.267) 6.45,7.551 6.095,7.906 5.944,8.057 5.944,8.185 5.944,14.656 6.73,15.442 6.958,15.442 v1(7.01,15.494) ; 6.646,6.151 6.963,6.469 cw(c7.247,6.186) 7.495,6.502 7.499,6.502 7.65,6.351 8.009,5.991 8.009,5.136 8.1,5.045 J1.57
CAM_D4_N: J1.48 U1.M8 | length 17
  Top Layer w0.117: 8.068,7.959 7.95,8.077 7.603,8.424 7.603,10.519 8.401,11.317 8.852,11.317 9.035,11.5 U1.M8@9.066,11.5 ; 8.069,7.958 ccw(c8.43,8.319) 8.791,7.959 9.128,8.296 ; 9.129,8.296 cw(c9.335,8.091) 9.541,8.296 ; 9.541,8.296 9.815,8.023 ; 9.815,7.609 9.478,7.272 ccw(c9.838,6.911) 9.478,6.55 9.765,6.262 ccw(c9.843,6.339) 9.766,6.261 9.885,6.143 10.191,5.837 10.191,5.834 10.191,5.666 ccw(c10.701,5.666) 10.701,5.156 10.874,5.156 cw(c10.874,4.864) 11.165,4.864 11.165,4.476 cw(c10.874,4.476) 10.874,4.185 10.701,4.185 ccw(c10.701,3.675) 10.191,3.675 10.191,3.097 10.191,2.6 cw(c10.047,2.6) 10.047,2.457 9.94,2.457 ccw(c9.94,2.313) 9.796,2.313 9.796,2.026 ccw(c9.94,2.026) 9.94,1.882 10.047,1.882 cw(c10.047,1.739) 10.191,1.739 10.191,1.68 10.191,1.454 10.029,1.293 v1(10.029,1.219) ; 9.815,7.61 ccw(c9.609,7.816) 9.815,8.022
  Bottom Layer w0.117: v1(10.029,1.219) 10.029,1.293 10.191,1.454 10.191,1.864 10.1,1.955 J1.48
CAM_D4_P: J1.46 U1.L8 | length 17.1
  Top Layer w0.117: U1.L8 9.498,11.098 8.492,11.098 7.822,10.429 7.822,8.515 8.105,8.232 8.223,8.114 ccw(c8.43,8.319) 8.636,8.114 8.973,8.451 cw(c9.335,8.091) 9.696,8.451 9.969,8.177 cw(c9.609,7.816) 9.97,7.455 9.633,7.118 ccw(c9.838,6.911) 9.632,6.705 9.888,6.449 10.039,6.298 10.289,6.048 10.409,5.928 10.409,5.834 10.409,5.666 ccw(c10.701,5.666) 10.701,5.375 10.874,5.375 cw(c10.874,4.864) 11.384,4.864 11.384,4.476 cw(c10.874,4.476) 10.874,3.966 10.701,3.966 ccw(c10.701,3.675) 10.409,3.675 10.409,3.097 10.409,2.819 10.409,1.454 10.571,1.293 v1(10.571,1.219)
  Bottom Layer w0.117: J1.46 10.5,1.955 10.409,1.864 10.409,1.454 10.571,1.293 v1(10.571,1.219)
ENABLE: J1.17 R5.1 R7.2 U2.1 U3.3 U4.3 | length 46.7
  Top Layer w0.203: v1(8.907,23.655) 10.69,21.872 v1(15.078,21.872)
  Layer 2 w0.203: v1(15.078,21.872) 16.301,20.65 22.682,20.65 23.113,20.219 23.113,16.669 v1@22.848,16.404 ; v1(17.758,5.945) 17.758,4.517 19.024,3.251 20.747,3.251 23.165,5.669 23.165,12.751 22.848,13.068 v1@22.848,16.404 ; v1(22.65,16.404) v1@22.848,16.404
  Bottom Layer w0.127: U3.3@15.078,22.58 U3.3 ; J1.17 16.1,5.828 16.47,6.198
  Bottom Layer w0.203: R7.2 8.661,23.406 8.907,23.652 v1(8.907,23.655) R5.1@8.907,24.567 ; v1(15.078,21.872) U3.3@15.078,22.58 ; 16.47,6.198 16.815,6.543 U4.3 17.758,6.466 v1(17.758,5.945) ; U2.1 22.386,15.238 22.386,16.073 22.65,16.337 v1(22.65,16.404)
FSTROBE: J1.19 TP6.1 U1.E1 | length 40.9
  Top Layer w0.127: U1.E1 14.767,17.167 14.767,17.654 15.324,18.212 18.694,18.212 19.715,17.191 19.715,5.794 17.272,3.351 16.333,3.351 16.191,3.209 v1(16.104,3.209)
  Layer 2 w0.127: v1(1.968,6.008) 3.666,6.008 6.661,3.012 11.288,3.012 11.735,2.565 13.829,2.565 14.148,2.884 15.686,2.884 16.005,3.203 16.097,3.203 v1(16.104,3.209)
  Bottom Layer w0.127: TP6.1@1.105,5.652 1.233,5.781 1.654,5.781 1.881,6.008 v1(1.968,6.008) ; J1.19 15.7,3.706 16.104,3.302 v1(16.104,3.209)
GND: C1.2 C2.2 C3.2 C4.2 C5.1 C6.1 C7.2 C8.1 C9.2 C10.1 C11.1 C12.1 C13.1 C14.1 C15.1 C16.1 C17.1 C18.1 C19.1 C20.2 C21.2 C22.2 C23.2 C24.2 C25.1 C26.1 C27.1 C28.1 C29.1 C30.1 C31.1 C32.1 C33.1 C34.1 C35.1 C36.1 C37.1 C38.1 C39.1 C40.1 J1.11 J1.12 J1.13 J1.14 J1.37 J1.38 J1.43 J1.44 J1.49 J1.50 J1.55 J1.56 J1.S1 pad.Q5 pad.Q6 pad.Q7 pad.Q8 R2.1 R7.1 U1.A3 U1.A5 U1.B2 U1.B3 U1.B6 U1.B9 U1.C2 U1.C4 U1.C7 U1.D1 U1.D2 U1.E3 U1.G8 U1.G9 U1.H2 U1.J2 U1.J8 U1.K2 U1.K4 U1.K7 U1.K9 U1.L1 U1.L4 U1.L6 U1.L9 U1.M4 U1.M6 U1.M9 U2.2 U3.2 U4.2 U5.1 X1.2 | length 71
  Top Layer w0.254: v1(8.382,14.427) U1.M4 ; v1(8.432,13.106) 8.484,13.106 U1.M6 ; U1.M9 U1.L9 v1(10.292,10.292) ; v1(9.449,17.882) U1.L1 ; v1(9.523,14.306) U1.L4 ; U1.L6 v1(10.295,13.478) ; v1(10.301,11.115) U1.K9 ; U1.K7 10.912,12.512 v1(11.581,12.512) ; U1.K4 v1(11.506,14.427) ; U1.K2 v1(11.086,16.702) ; U1.J8 11.875,11.875 11.875,12.493 v1(12.144,12.762) ; U1.J2 v1(11.892,16.708) ; U1.H2 12.7,16.7 v1(12.7,16.713) ; v1(12.802,12.649) U1.G8 ; U1.G9 v1(13.492,10.292) ; v1(13.36,14.656) 14.146,14.729 14.227,14.811 14.24,14.83 U1.E3 ; v1(15.084,16.7) U1.D2 ; U1.D1 15.85,17.577 v1(15.85,17.754) ; v1@15.915,16.701 U1.C2 ; U1.C7 v1(16.698,12.682) ; U1.C4 v1(16.698,15.103) ; v1(16.693,16.708) U1.B2 ; U1.B9 v1(17.498,11.082) ; U1.B6 v1(17.487,13.487) ; U1.B3 U1.A3 18.213,15.187 v1(18.469,15.187) ; U1.A5 18.304,13.496 v1(18.607,13.496)
  Bottom Layer w0.203: 7.239,4.064 7.3,4.125 J1.S1@7.3,4.83 ; 7.29,2.896 7.29,2.18 J1.S1@7.3,2.17 ; 8.433,3.962 8.5,4.03 J1.55 ; C20.2 C21.2 ; J1.14 J1.13 16.9,5.394 17.247,5.74 v1(17.247,5.766) ; 17.17,5.512 17.3,5.382 J1.11 J1.12 17.272,1.27 ; C35.1 19.499,10.675 C2.2
  Bottom Layer w0.254: C14.1@9.457,11.786 9.457,12.776 v1(9.523,14.306) ; C14.1 9.562,11.317 9.764,11.115 v1(10.301,11.115) C36.1 C31.1 v1(13.492,10.292) C34.1 C26.1 ; C32.1 C11.1 C33.1 C24.2 ; C39.1 v1(11.086,16.702) ; C12.1 C28.1 C27.1 ; v1(12.7,16.713) C40.1 ; v1(16.942,7.518) 16.954,7.506 17.823,7.506 U4.2 ; J1.S1@19.7,2.17 19.72,2.19 20.326,2.19 v1(20.345,2.21) ; J1.S1@19.7,4.83 19.709,4.821 20.337,4.821 v1(20.345,4.813)
  Bottom Layer w0.381: v1(16.331,7.508) 16.942,7.502 U4.2 C25.1 ; C19.1 v1(16.698,12.682) ; v1(17.487,13.487) C30.1@17.813,12.243 ; C22.2 v1(20.168,14.732) ; R2.1@19.873,13.138 20.639,12.371 v1(20.639,12.333) ; v1(23.266,13.945) U2.2 23.376,15.278 23.376,15.894 23.583,16.102 23.583,16.421 v1(23.597,16.434)
  Bottom Layer w0.508: v1(13.962,23.614) U3.2 ; C9.2 17.138,21.926 18.057,21.926 18.371,22.24 C4.2 18.622,22.238 20.572,22.238 C3.2
  other v1: 7.903,0.41 9.135,0.414 10.34,0.428 18.263,0.508 19.737,0.508 21.211,0.508 4.476,0.74 5.176,0.74 5.876,0.74 6.576,0.74 12.176,0.74 14.276,0.74 15.676,0.74 16.376,0.74 17.076,0.74 5.526,1.44 6.226,1.44 12.526,1.44 16.726,1.44 5.176,2.14 5.876,2.14 5.526,2.84 12.479,3.33 5.176,3.54 3.776,4.94 6.576,4.94 9.726,5.64 12.827,5.664 5.526,7.04 1.676,7.74 4.126,8.44 23.726,8.44 24.426,8.44 25.126,8.44 25.826,8.44 26.526,8.44 0.976,9.14 3.076,9.14 3.776,9.14 8.676,9.14 3.426,9.84 4.126,9.84 3.776,10.54 3.426,11.24 4.126,11.24 7.626,11.24 25.826,11.24 26.526,11.24 3.776,11.94 25.476,11.94 26.176,11.94 4.126,12.64 25.126,12.64 25.826,12.64 26.526,12.64 23.376,13.34 24.776,13.34 25.476,13.34 26.176,13.34 4.126,14.04 24.426,14.04 25.126,14.04 25.826,14.04 26.526,14.04 5.176,14.74 25.476,14.74 26.176,14.74 1.326,15.44 2.026,15.44 3.426,15.44 25.826,15.44 26.526,15.44 26.176,16.14 15.888,16.701 2.726,16.84 4.826,16.84 24.426,16.84 26.526,16.84 0.976,17.54 1.676,17.54 2.376,17.54 4.476,17.54 5.176,17.54 7.276,17.54 7.976,17.54 24.076,17.54 1.326,18.24 4.826,18.24 5.526,18.24 6.226,18.24 8.326,18.24 23.726,18.24 26.526,18.24 0.976,18.94 4.476,18.94 5.176,18.94 5.876,18.94 6.576,18.94 8.676,18.94 24.076,18.94 1.326,19.64 6.926,19.64 7.626,19.64 23.726,19.64 26.526,19.64 0.976,20.34 7.976,20.34 10.776,20.34 11.476,20.34 12.176,20.34 12.876,20.34 13.576,20.34 14.276,20.34 14.976,20.34 15.676,20.34 24.076,20.34 24.776,20.34 25.476,20.34 26.176,20.34 3.426,21.04 4.126,21.04 4.826,21.04 5.526,21.04 10.426,21.04 11.126,21.04 11.826,21.04 12.526,21.04 13.226,21.04 13.926,21.04 14.626,21.04 23.026,21.04 23.726,21.04 24.426,21.04 25.126,21.04 25.826,21.04 26.526,21.04 0.976,21.74 1.676,21.74 2.376,21.74 3.076,21.74 3.776,21.74 4.476,21.74 5.176,21.74 5.876,21.74 7.276,21.74 22.676,21.74 23.376,21.74 24.076,21.74 24.776,21.74 25.476,21.74 26.176,21.74 4.126,22.44 4.826,22.44 5.526,22.44 6.226,22.44 6.926,22.44 13.926,22.44 22.326,22.44 26.526,22.44 5.176,23.14 5.876,23.14 6.576,23.14 7.276,23.14 13.576,23.14 17.776,23.14 18.476,23.14 19.176,23.14 21.976,23.14 5.526,23.84 6.226,23.84 6.926,23.84 11.826,23.84 12.526,23.84 13.226,23.84 20.926,23.84 21.626,23.84 5.176,24.54 5.876,24.54 6.576,24.54 7.276,24.54 13.576,24.54 20.576,24.54 21.276,24.54 5.526,25.24 6.226,25.24 6.926,25.24 9.726,25.24 10.426,25.24 11.126,25.24 11.826,25.24 14.626,25.24 20.226,25.24 20.926,25.24 21.626,25.24 5.176,25.94 5.876,25.94 6.576,25.94 7.276,25.94 17.776,25.94 18.476,25.94 19.176,25.94 19.876,25.94 20.576,25.94 21.276,25.94 21.976,25.94
GPO: J1.29 TP4.1 U1.A9 | length 27
  Top Layer w0.127: v1(13.328,3.777) 13.384,3.777 13.924,4.318 16.998,4.318 18.839,6.159 18.839,10.346 18.485,10.7 U1.A9
  Layer 2 w0.127: v1(2.311,7.722) 2.348,7.685 2.609,7.685 6.843,3.45 11.533,3.45 11.802,3.72 13.271,3.72 v1(13.328,3.777)
  Bottom Layer w0.127: v1(2.311,7.722) 2.321,7.731 3.358,7.731 TP4.1 ; v1(13.328,3.777) 13.7,4.149 J1.29
NetC2_1: C2.1 C5.2 FB1.2 U2.4 | length 4.5
  Bottom Layer w0.635: C2.1@22.568,10.236 22.568,10.286 24.199,11.917 24.199,12.551 U2.4
  Bottom Layer w0.762: FB1.2 C2.1@22.568,10.236
NetC20_1: C20.1 U1.C8 | length 1.8
  Top Layer w0.254: v1(15.646,12.116) U1.C8
  Bottom Layer w0.381: C20.1 v1(15.646,12.116)
NetC21_1: C21.1 U1.C6 | length 1.8
  Top Layer w0.254: U1.C6 v1(16.716,13.5)
  Bottom Layer w0.381: C21.1 v1(16.716,13.5)
NetC22_1: C22.1 U1.C5 | length 1.5
  Top Layer w0.254: U1.C5 v1(16.716,14.3)
  Bottom Layer w0.381: v1(16.716,14.3) 16.729,14.313 17.59,14.313 C22.1
NetC38_2: C38.2 R4.1 R5.2 U5.3 | length 8.4
  Bottom Layer w0.305: U5.3 6.24,19.914 6.426,20.1 C38.2 7.095,20.15 7.933,20.988 R5.2 R4.1
NetL1_1: L1.1 U2.3 | length 3.4
  Bottom Layer w0.762: U2.3@24.361,15.451 25.232,16.322 25.232,18.349 L1.1
NetR1_1: R1.1 R2.2 U2.5 | length 2.9
  Bottom Layer w0.127: R1.1@20.853,14.316 20.799,14.261 20.799,13.187 20.744,13.132 U2.5
NetR3_1: R3.1 X1.3 | length 1.4
  Bottom Layer w0.254: X1.3 1.15,10.077 R3.1@1.393,9.834
NetR6_1: R6.1 U5.2 | length 4.2
  Bottom Layer w0.203: U5.2 2.652,20.864 3.734,19.782 3.734,17.467 R6.1@3.759,17.442
NetTP3_1: TP3.1 U1.A8 | length 2.3
  Top Layer w0.117: U1.A8 17.913,11.513 18.527,11.513 v1(18.54,11.527)
  Bottom Layer w0.117: v1(18.54,11.527) 18.67,11.571 19.897,11.995 19.934,12.008 TP3.1@20.108,12.008
SCL_1V8: J1.21 TP1.1 U1.B7 | length 18.5
  Top Layer w0.117: 17.628,11.913 17.738,11.913 ; 17.739,11.912 18.687,11.912 18.948,11.65
  Top Layer w0.127: v1(15.243,3.869) 15.296,3.922 15.659,3.922 15.836,4.099 17.089,4.099 19.058,6.068 19.058,11.541 18.948,11.65 ; U1.B7 17.487,11.913 17.628,11.913
  Layer 2 w0.127: v1(15.243,3.869) 16.324,3.869 16.662,3.531 16.662,2.845 15.799,1.981 v1(15.799,1.295)
  Bottom Layer w0.127: TP1.1 15.115,1.119 15.535,1.119 15.711,1.295 v1(15.799,1.295) ; v1(15.243,3.869) 15.293,3.919 15.293,4.823 J1.21
SDA_1V8: J1.27 TP2.1 U1.A7 | length 18.2
  Top Layer w0.127: v1(14.117,1.338) 14.021,1.435 14.021,3.757 v1(14.021,3.81) 14.696,3.81 15.017,3.489 15.535,3.489 15.927,3.88 17.179,3.88 19.277,5.978 19.277,11.631 18.608,12.3 U1.A7
  Bottom Layer w0.127: TP2.1 13.492,1.016 13.814,1.338 v1(14.117,1.338) ; v1(14.021,3.81) 14.021,3.897 14.1,3.977 J1.27
VIN_5V: C1.1 FB1.1 FB2.1 J1.1 J1.2 J1.3 J1.4 J1.5 J1.6 J1.7 J1.8 J1.9 J1.10 | length 5.9
  Bottom Layer w0.254: FB2.1 20.799,6.587 21.436,5.949 21.647,5.949 21.975,6.278 21.975,6.418 22.658,7.1 22.708,7.1 22.758,7.1 23.637,6.22 23.847,6.22 24.382,6.755 C1.1@25.248,6.755
XCLR: J1.15 R6.2 TP7.1 U1.J9 | length 36.7
  Top Layer w0.117: U1.J9 11.888,10.312 11.888,9.27 11.89,9.268
  Top Layer w0.127: 11.89,9.268 14.902,6.256 16.125,6.256 v1(16.623,5.759)
  Layer 2 w0.127: v1@2.729,16.038 2.729,10.095 1.981,9.347 1.981,8.622 6.934,3.669 11.442,3.669 11.711,3.939 12.676,3.939 13.317,4.58 15.984,4.58 16.623,5.218 v1(16.623,5.759)
  Bottom Layer w0.127: TP7.1 2.376,16.332 2.58,16.129 v1(2.667,16.129) 2.754,16.129 2.916,16.291 3.456,16.291 R6.2 ; J1.15 16.5,5.636 v1(16.623,5.759)
XVS: J1.25 TP5.1 U1.A2 | length 34.3
  Top Layer w0.127: v1(14.592,3.327) 14.65,3.27 15.626,3.27 15.946,3.59 17.201,3.59 19.496,5.885 19.496,14.997 18.26,16.233 17.967,16.233 U1.A2
  Layer 2 w0.127: v1(2.159,6.96) 3.024,6.96 6.752,3.231 11.475,3.231 11.786,2.921 13.685,2.921 13.995,3.231 14.357,3.231 14.39,3.265 14.531,3.265 v1(14.592,3.327)
  Bottom Layer w0.127: TP5.1@0.991,7.087 1.056,7.021 2.097,7.021 v1(2.159,6.96) ; J1.25 14.5,3.507 14.63,3.377 v1@14.63,3.364
pads on no net: C1.0 C2.0 C3.0 C4.0 C5.0 C6.0 C7.0 C8.0 C9.0 C10.0 C11.0 C12.0 C13.0 C14.0 C15.0 C16.0 C17.0 C18.0 C19.0 C20.0 C21.0 C22.0 C23.0 C24.0 C25.0 C26.0 C27.0 C28.0 C29.0 C30.0 C31.0 C32.0 C33.0 C34.0 C35.0 C36.0 C37.0 C38.0 C39.0 C40.0 FB1.0 FB2.0 J1.16 J1.18 J1.20 J1.22 J1.23 J1.24 J1.26 J1.28 J1.30 J1.31 J1.32 J1.33 J1.34 J1.35 J1.36 J1.40 J1.41 J1.42 J1.45 J1.47 R1.0 R2.0 R3.0 R4.0 R5.0 R6.0 R7.0 U1.A4 U1.B4 U1.B5 U1.B8 U1.C9 U1.C10 U1.D9 U1.D10 U1.E2 U1.E9 U1.E10 U1.F1 U1.F2 U1.F3 U1.F9 U1.F10 U1.G1 U1.G2 U1.G3 U1.H3 U1.H9 U1.H10 U1.J3 U1.Q1 U1.Q2 U1.Q3 U1.Q4 U2.0 U3.0 U3.4 U4.0 U4.4 U5.0

## Polygon pours and split planes (outlines as drawn)
GND on Bottom Layer "GND_L04_P017" (solid, remove dead copper, pour order 17): 1.27,0 25.73,0 ccw(c25.73,1.27) 27,1.27 27,25.73 ccw(c25.73,25.73) 25.73,27 1.27,27 ccw(c1.27,25.73) 0,25.73 0,1.27 ccw(c1.27,1.27)
VIN_5V on Bottom Layer "VIN_5V_L04_P009" (solid, pour order 9): 17.475,1.016 17.475,6.502 22.225,6.502 22.225,1.016
2V8 on Bottom Layer "2V8_L04_P000" (solid, pour order 0): 13.432,8.915 14.056,8.915 14.658,9.518 16.819,9.518 17.136,9.201 17.12,9.185 17.12,7.112 13.437,7.112 13.437,7.62
+5V on Bottom Layer "+5V_L04_P015" (solid, pour order 15): 18.186,24.943 18.186,23.495 19.736,23.495 19.736,24.943
1V05 on Bottom Layer "1V05_L04_P013" (solid, pour order 13): 18.771,20.701 21.996,20.701 21.996,17.729 19.583,17.729 18.771,18.821
+5V on Bottom Layer "+5V_L04_P012" (solid, pour order 12): 20.447,8.179 20.447,9.804 21.793,9.804 21.793,8.179
VIN_5V on Bottom Layer "VIN_5V_L04_P010" (solid, pour order 10): 19.406,6.223 20.244,7.061 21.641,7.061 21.641,7.083 22.33,7.772 26.822,7.772 26.822,3.353 26.568,3.099 21.666,3.099
GND on Layer 2 "GND_L03_P008" (solid, remove dead copper, pour order 8): 1.27,0 cw(c1.27,1.27) 0,1.27 0,25.73 cw(c1.27,25.73) 1.27,27 25.73,27 cw(c25.73,25.73) 27,25.73 27,1.27 cw(c25.73,1.27) 25.73,0
1V05 on Layer 2 "1V05_L03_P007" (solid, remove dead copper, pour order 7): 11.405,10.922 11.405,12.7 14.275,12.7 14.275,7.112 17.018,7.112 17.018,16.154 9.627,16.154 9.627,19.939 17.221,19.939 17.221,20.574 23.089,20.574 23.089,2.705 11.557,2.705 11.557,5.309 9.474,7.391 9.474,10.922
GND on Layer 2 "GND_L03_P003" (solid, pour order 3): 9.474,16.764 9.474,7.391 11.557,5.309 11.557,0.102 6.426,0.102 6.426,4.166 4.343,6.248 4.343,14.681 6.426,16.764
2V8 on Layer 2 "2V8_L03_P006" (solid, pour order 6): 14.275,7.112 17.018,7.112 17.018,16.154 9.627,16.154 9.627,10.922 11.405,10.922 11.405,12.7 14.275,12.7
no net on Layer 2 "NONET_L03_P002" (solid, pour order 2): 7.188,16.535
GND on Top Layer "GND_L01_P019" (solid, remove dead copper, pour order 19): 1.27,0 25.73,0 ccw(c25.73,1.27) 27,1.27 27,25.73 ccw(c25.73,25.73) 25.73,27 1.27,27 ccw(c1.27,25.73) 0,25.73 0,1.27 ccw(c1.27,1.27)
1V05 on Top Layer "1V05_L01_P011" (solid, pour order 11): 19.11,19.623 20.767,19.623 20.845,19.545 20.845,18.291 20.639,18.291 19.947,18.303 19.04,19.481
no net on Top Layer "NONET_L01_P020" (solid, pour order 20): 19.228,19.456
+5V on Top Layer "+5V_L01_P016" (solid, pour order 16): 18.466,24.968 19.583,24.968 19.583,23.724 18.466,23.724
+5V on Top Layer "+5V_L01_P014" (solid, pour order 14): 20.523,9.957 21.92,9.957 21.92,8.839 20.523,8.839
GND on Layer 1 "GND_L02_P018" (solid, pour order 18): 1.27,0 cw(c1.27,1.27) 0,1.27 0,25.73 cw(c1.27,25.73) 1.27,27 25.73,27 cw(c25.73,25.73) 27,25.73 27,1.27 cw(c25.73,1.27) 25.73,0

## Keep-outs
Keep-Out Layer:
  lines w0.02: 0,1.27 ccw(c1.27,1.27) 1.27,0 3.937,0 21.082,0 25.73,0 ccw(c25.73,1.27) 27,1.27 27,5.918 27,23.038 27,25.73 ccw(c25.73,25.73) 25.73,27 23.038,27 1.854,27 1.27,27 ccw(c1.27,25.73) 0,25.73 0,25.146 0,3.937 0,1.27

## Other copper
Top Layer:
  pour cut-out: 10.185,16.942 10.338,16.789 10.313,16.764 10.313,10.313 10.292,10.292 10.846,9.738 10.846,8.077 12.319,6.604 12.319,3.48 11.786,2.946 11.786,0.914 11.379,0.508 7.29,0.508 6.782,1.016 6.782,3.581 5.105,5.258 5.105,13.259 5.486,13.64 5.486,16.205 6.223,16.942
Bottom Layer:
  pour cut-out: 13.432,8.915
  pour cut-out: 7.3,2.17 7.3,1.763 6.934,1.397 6.934,0.991 7.341,0.584 10.871,0.584 11.3,1.013 11.3,2.17
  pour cut-out: 5.588,15.9 6.299,16.612 7.823,16.612 8.636,15.799 8.636,10.942 9.551,10.027 9.551,6.021 9.325,5.795 9.423,5.696 9.423,4.623 6.477,4.623 4.597,6.502 4.597,14.91

## Silkscreen, mask and mechanical layers (free items; w line width, h text height)
Bottom Overlay:
  text "www.CircuitValley.com" at 21.615,0.83 h0.81
Top Solder:
  text "PhoMX477 1V0 2242" at 5.435,25.779 h0.81
  text "CircuitValley.com" at 5.468,24.419 h0.81
Mechanical 15:
  the board outline again, w0.025